# Altium PCB PCB2.PcbDoc
Units mil, origin at the board's own origin, x right, y up, seen from the top; angles counter-clockwise.
Board outline 3660.31 x 1534.33 mil, 2 copper layers (Top Layer, Bottom Layer); 32 components, 30 nets, 109 pads, 1 vias.
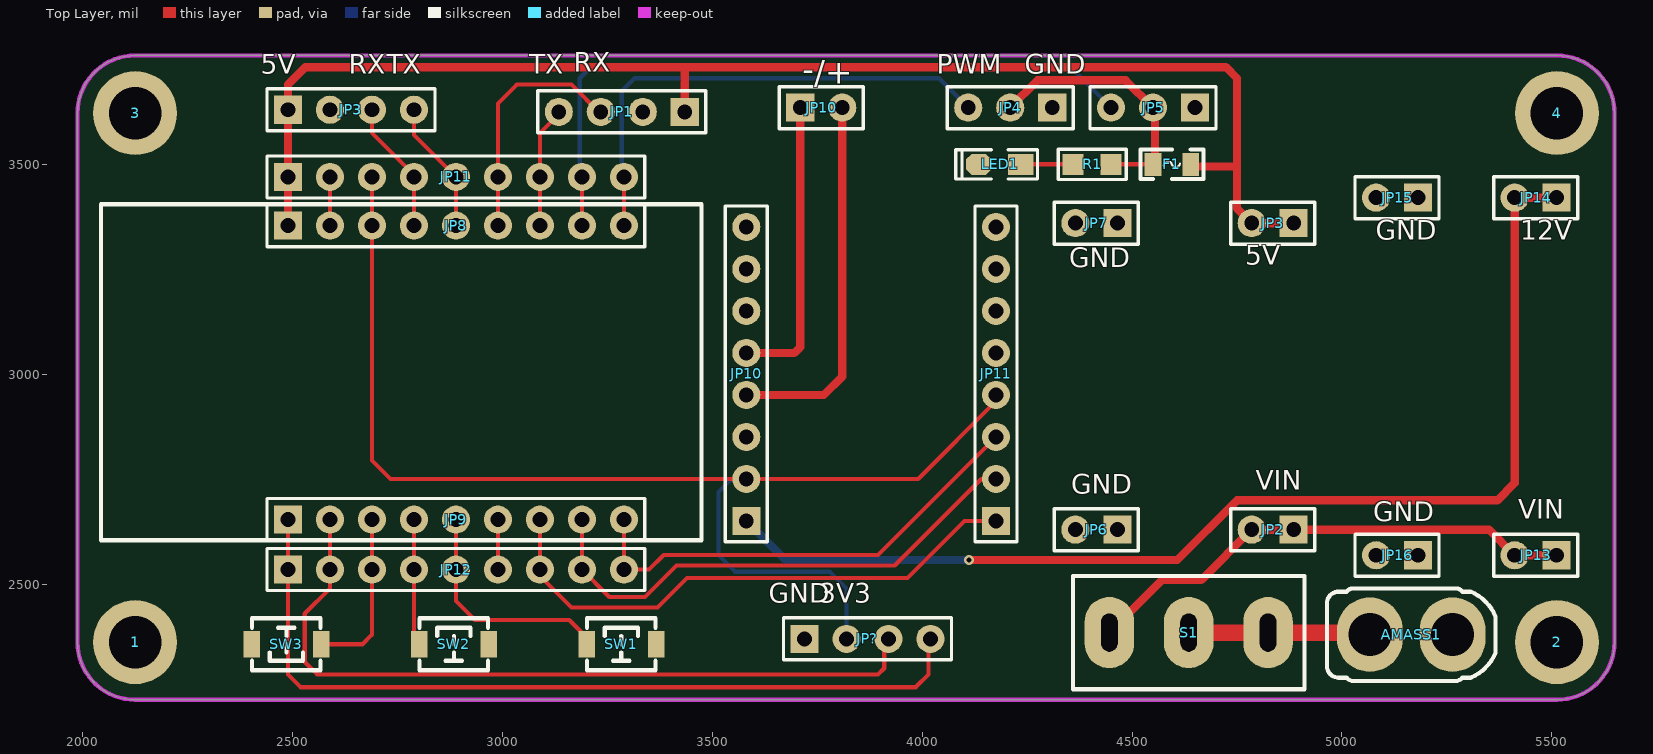
[diagram p0: Top Layer view]
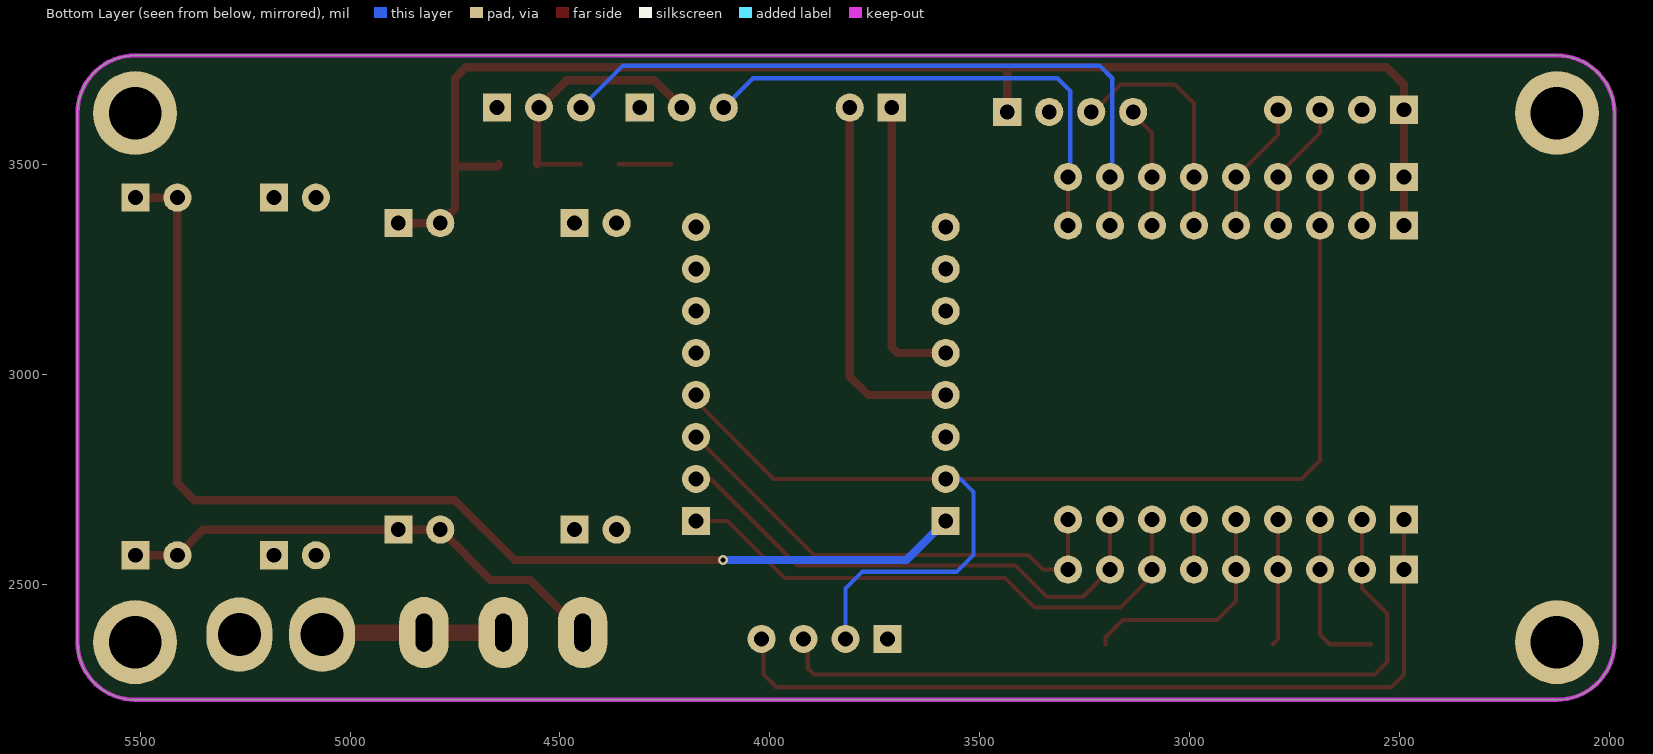
[diagram p1: Bottom Layer view, seen from below]

## Layer stack, top to bottom
Top Solder: solder mask 0.4, Solder Resist, Dk 3.5
Top Layer: signal copper 1.4
Dielectric 1: dielectric 12.6, FR-4, Dk 4.8
Bottom Layer: signal copper 1.4
Bottom Solder: solder mask 0.4, Solder Resist, Dk 3.5

## Board outline
2125.98,2224.96 cw(c2125.98,2362.2) 1988.74,2362.2 1988.74,3622.05 cw(c2125.98,3622.05) 2125.98,3759.29 5511.81,3759.29 cw(c5511.81,3622.05) 5649.06,3622.05 5649.06,2362.2 cw(c5511.81,2362.2) 5511.81,2224.96

## Design rules (kind name [scope] priority, off if disabled: settings)
Clearance [All] p1: gap=7.87 ignorepadtopadclearanceinfootprint=TRUE
PlaneConnect [All] p1: planeconnectstyle=Direct reliefexpansion=20 reliefentries=4 reliefconductorwidth=10 reliefairgap=10
PolygonConnect [All] p1: connectstyle=Direct reliefconductorwidth=10 reliefentries=4 polygonreliefangle="90 Angle" airgapwidth=10
RoutingVias [All] p1: holewidth=28 width=50 viastyle="Through Hole" minholewidth=28 minwidth=50 maxholewidth=28 maxwidth=50
SolderMaskExpansion [All] p1: expansion=4 istentingtop=FALSE
Width [All] p1: maxlimit=393.7 minlimit=10 preferedwidth=10 minimp=50.000000 maximp=50.000000 favimp=50.000000
29 further rules are at their usual default settings.

## Classes and differential pairs
component class Sheet3: 1 2 3 4 AMASS1 F1 JP1 JP2 JP3 JP4 JP5 JP6 JP7 JP8 JP9 JP10 JP11 JP12 JP13 JP14 JP15 JP16 JP? LED1 R1 S1 SW1 SW2 SW3

## Components (designator, comment, footprint, x,y, rotation, side; value= is the part's Value field where it differs from the comment)
1 "M3" "M3 125X200" 2125.98,2362.2 r90 top
2 "M3" "M3 125X200" 5511.81,2362.2 r90 top
3 "M3" "M3 125X200" 2125.98,3622.05 r90 top
4 "M3" "M3 125X200" 5511.81,3622.05 r90 top
AMASS1 "XT30x-F" XT30U-M 5165,2380 r0 top
F1 "6V/0.35A" "FU 0805" 4595,3500 r180 top
JP1 "HDR-1X4" HDR2.54-LI-4P 3285,3625 r180 top
JP2 "HDR-1X2" HDR2.54-LI-2P 4835,2630 r180 top
JP3 "HDR-1X4" HDR2.54-LI-4P 2640,3630 r0 top
JP3 "HDR-1X2" HDR2.54-LI-2P 4835,3360 r180 top
JP4 "HDR-1X3" HDR2.54-LI-3P 4210,3635 r180 top
JP5 "HDR-1X3" HDR2.54-LI-3P 4550,3635 r180 top
JP6 "HDR-1X2" HDR2.54-LI-2P 4415,2630 r180 top
JP7 "HDR-1X2" HDR2.54-LI-2P 4415,3360 r180 top
JP8 "HDR-1X9" HDR2.54-M-LI-9P 2890,3354.09 r0 top locked
JP9 "HDR-1X9" HDR2.54-M-LI-9P 2890,2654.09 r0 top locked
JP10 "HDR-1X2" HDR2.54-LI-2P 3760,3635 r0 top
JP10 "HDR-1X8" HDR2.54-M-LI-8P 3581.5,3000.91 r90 top
JP11 "HDR-1X9" HDR2.54-LI-9P 2890,3470 r0 top
JP11 "HDR-1X8" HDR2.54-M-LI-8P 4175.98,3000.91 r90 top
JP12 "HDR-1X9" HDR2.54-LI-9P 2890,2535 r0 top
JP13 "HDR-1X2" HDR2.54-LI-2P 5461.14,2569.06 r180 top
JP14 "HDR-1X2" HDR2.54-LI-2P 5461.14,3420.63 r180 top
JP15 "HDR-1X2" HDR2.54-LI-2P 5131.22,3420.63 r180 top
JP16 "HDR-1X2" HDR2.54-LI-2P 5131.22,2569.06 r180 top
JP? "HDR-1X4" HDR2.54-M-LI-4P 3870,2370 r0 top
LED1 "Colour" "LED 0805G" 4185,3500 r180 top
R1 "1K" "R 0805_M" 4405,3500 r0 top
S1 "SS-12F23" SS-12D10 4635,2385 r180 top
SW1 "6x6x5" "TSW SMD-3*4*2" 3283.84,2357.2 r0 top
SW2 "6x6x5" "TSW SMD-3*4*2" 2885,2357.2 r0 top
SW3 "6x6x5" "TSW SMD-3*4*2" 2486.16,2357.2 r180 top

## Footprints (in the part's own frame and the unit in brackets; to place one, negate y for a bottom-side part, rotate by r counter-clockwise, add the part's x,y. Pads: shape width x height; smd on the part's side, far side on the other; paste and mask are expansions set on the pad)
"FU 0805" [mil] "贴片保险丝"
  rect 40x55 smd: 1(-45,0) 2(45,0)
  silkscreen extent -75,-35 75,35, body extent -39,-24 39,24, height 20
HDR2.54-LI-2P [mm] "排针，2脚"
  rect 1.7x1.7 hole 0.9: 1(-1.27,0)
  round 1.7 hole 0.9: 2(1.27,0)
  silkscreen extent -2.54,-1.27 2.54,1.27, body extent -2.54,-1.27 2.54,1.27, height 8.5
HDR2.54-LI-3P [mm] "排针，3脚"
  rect 1.7x1.7 hole 0.9: 1(-2.54,0)
  round 1.7 hole 0.9: 2(0,0) 3(2.54,0)
  silkscreen extent -3.81,-1.27 3.81,1.27, body extent -3.81,-1.27 3.81,1.27, height 8.5
HDR2.54-LI-4P [mm] "排针，4脚"
  rect 1.7x1.7 hole 0.9: 1(-3.81,0)
  round 1.7 hole 0.9: 2(-1.27,0) 3(1.27,0) 4(3.81,0)
  silkscreen extent -5.08,-1.27 5.08,1.27, body extent -5.08,-1.27 5.08,1.27, height 8.5
HDR2.54-LI-9P [mm] "排针，9脚"
  rect 1.7x1.7 hole 0.9: 1(-10.16,0)
  round 1.7 hole 0.9: 2(-7.62,0) 3(-5.08,0) 4(-2.54,0) 5(0,0) 6(2.54,0) 7(5.08,0) 8(7.62,0) 9(10.16,0)
  silkscreen extent -11.43,-1.27 11.43,1.27, body extent -11.43,-1.27 11.43,1.27, height 8.5
HDR2.54-M-LI-4P [mm] "排母，4脚"
  rect 1.7x1.7 hole 0.9: 1(-3.81,0)
  round 1.7 hole 0.9: 2(-1.27,0) 3(1.27,0) 4(3.81,0)
  silkscreen extent -5.08,-1.27 5.08,1.27, body extent -5.08,-1.27 5.08,1.27, height 8.5
HDR2.54-M-LI-8P [mm] "排母，8脚"
  rect 1.7x1.7 hole 0.9: 1(-8.89,0)
  round 1.7 hole 0.9: 2(-6.35,0) 3(-3.81,0) 4(-1.27,0) 5(1.27,0) 6(3.81,0) 7(6.35,0) 8(8.89,0)
  silkscreen extent -10.16,-1.27 10.16,1.27, body extent -10.16,-1.27 10.16,1.27, height 8.5
HDR2.54-M-LI-9P [mm] "排母，9脚"
  rect 1.7x1.7 hole 0.9: 1(-10.16,0)
  round 1.7 hole 0.9: 2(-7.62,0) 3(-5.08,0) 4(-2.54,0) 5(0,0) 6(2.54,0) 7(5.08,0) 8(7.62,0) 9(10.16,0)
  silkscreen extent -11.43,-1.27 11.43,1.27, body extent -11.43,-1.27 11.43,1.27, height 8.5
"LED 0805G" [mil] "绿色0805LED"
  rect 60x50 smd: 1(-50,0)
  oct 60x50 smd: 2(50,0)
  silkscreen extent -90,-35 105,35, body extent -39,-25 39,25, height 32
"M3 125X200" [mil] "M3螺丝孔，孔125Mil，焊盘200Mil"
  round 200 hole 125: 1(0,0)
"R 0805_M" [mil] "1/8W贴片电阻"
  rect 50x50 smd: 1(-45,0) 2(45,0)
  silkscreen extent -81,-36 81,36, body extent -39,-25 39,25, height 20
SS-12D10 [mm] "脚距4.8mm"
  oval 3x4.3 hole 2.3 slot 1 at 0 deg: 1(-4.8,0) 2(0,0) 3(4.8,0)
  silkscreen extent -7,-3.43 7,3.43, body extent -6.71,-3.3 6.71,3.3, height 11.8
"TSW SMD-3*4*2" [mm] "3*4*2mm"
  rect 1x1.6 smd: 1(-2.1,0) 2(2.1,0)
  silkscreen extent -2.08,-1.58 2.08,1.58, body extent -2.45,-1.45 2.45,1.45, height 2
XT30U-M [mm] "长：10.2mm，宽：5.2mm，高：10.7mm"
  oval 4x4.5 hole 2.6: 1(-2.5,0) 2(2.5,0)
  silkscreen extent -5.1,-2.8 5.1,2.8, body extent -5.1,-2.8 5.1,2.8, height 10.71

## Part data
1 2 3 4: "铜柱孔"
AMASS1: library part XT30, "Amass防打火电源接口，XT30系列"
F1: library part FU, "贴片保险丝", BOM名称=贴片, 学习资源=www.ooocke.
JP1 JP3 JP?: library part "Header 4", "4P接插件"
  JP1: BOM名称=4P, 学习资源=www.oooc
  JP3 JP?: BOM名称=4P接, 学习资源=www.ooocke.
JP2 JP3 JP6 JP7 JP10 JP13 JP14 JP15 JP16: library part "Header 2", "2P接插件", BOM名称=2P, 学习资源=www.oooc
JP4 JP5: library part "Header 3", "3P接插件", BOM名称=3P, 学习资源=www.oooc
JP8 JP9 JP11 JP12: library part "Header 9", "9P接插件"
  JP8 JP9: BOM名称=9P, 学习资源=www.oooc
  JP11 JP12: BOM名称=9P接, 学习资源=www.ooocke.
JP10 JP11: library part "Header 8", "8P接插件", BOM名称=8P, 学习资源=www.oooc
LED1: library part LED-SMD, "贴片LED", BOM名称=贴片, 学习资源=www.ooocke.
R1: library part R, "贴片电阻", BOM名称=贴?, 学习资源=www.ooocke.
S1: library part SSW-1P, "1路拨动开关", BOM名称=?, 学习资源=www.oooc
SW1 SW2 SW3: library part "TSW SMD-6x6", "贴片6x6轻触开关", BOM名称=贴片6, 学习资源=www.oooc

## Via types
v1: diameter 24, hole 12, Top Layer to Bottom Layer, 1 vias

## Nets (pads, with @x,y where several pads share a name; then routed paths per layer and width w, separated by ;. In a path a pad name is that pad's centre, name@x,y a point inside that pad or via, vN(x,y) a via of type N, cw(c..) or ccw(c..) an arc to the next point about the centre after c; other vN are vias at no path point)
2S_VIN: JP2.1 JP2.2 JP13.1 JP13.2 S1.3 | length 1191.8
  Top Layer w19.68: S1.3 4571.02,2510 4665,2510 JP2.2 JP2.1 5350.2,2630 JP13.2 JP13.1
3V3: JP8.3 JP10.2@3581.5,2750.91 JP11.3@2690,3470 JP11.4@4175.98,2950.91 JP?.2 | length 2958.3
  Top Layer w10: JP11.3@2690,3470 JP8.3 2690,2795 2734.09,2750.91 3581.5,2750.91 3990.91,2750.91 4175.98,2935.98 JP11.4@4175.98,2950.91
  Bottom Layer w10: JP10.2@3581.5,2750.91 3545.91,2750.91 3515,2720 3515,2570 3555,2530 3780,2530 3820,2490 JP?.2
5V: F1.1 JP1.1 JP3.1 JP3.2@4785,3360 JP8.1 JP11.1@2490,3470 | length 3287.1
  Top Layer w19.68: JP8.1 2490,3470 2490,3690 2531.5,3731.5 3435,3731.5 ; JP1.1@3435,3635 3435,3731.5 ; F1.1@4645,3500 4650,3495 4750,3495 ; JP3.1@4885,3360 4785,3360 4750,3395 4750,3495 ; 3435,3731.5 4723.5,3731.5 4750,3705 4750,3495
5V_POWER: F1.2 JP4.2 JP5.2 R1.2 | length 630.9
  Top Layer w10: R1.2 F1.2
  Top Layer w19.68: JP4.2 4275,3700 4485,3700 JP5.2 4555,3630 F1.2@4555,3500
12V: JP10.1@3581.5,2650.91 JP14.1 JP14.2 | length 2723.7
  Top Layer w19.68: v1(4112.29,2557.71) 4607.71,2557.71 4750,2700 5370,2700 5411.14,2741.14 JP14.2 JP14.1
  Bottom Layer w19.68: JP10.1@3581.5,2650.91 3674.69,2557.71 v1(4112.29,2557.71)
AIN1: JP9.9 JP11.3@4175.98,2850.91 JP12.9 | length 1135.9
  Top Layer w10: JP9.9 JP12.9 3350,2535 3385,2570 3895.08,2570 JP11.3@4175.98,2850.91
AO1: JP10.2@3810,3635 JP10.4 | length 886.8
  Top Layer w19.68: JP10.4 3765.91,2950.91 3810,2995 JP10.2@3810,3635
AO2: JP10.1@3710,3635 JP10.5 | length 704.3
  Top Layer w19.68: JP10.5 3695.91,3050.91 3710,3065 JP10.1@3710,3635
BIN1: JP11.5@4175.98,3050.91
BO1: JP10.7
BO2: JP10.6
DIR_A: JP9.8 JP11.2@4175.98,2750.91 JP12.8 | length 1248.4
  Top Layer w10: JP9.8 JP12.8 3255,2470 3340,2470 3415,2545 3935,2545 4140.91,2750.91 JP11.2@4175.98,2750.91
DIR_B: JP11.6@4175.98,3150.91
GND: AMASS1.2 JP1.2 JP3.2@2590,3630 JP4.1 JP5.1 JP6.1 JP6.2 JP7.1 JP7.2 JP8.2 JP10.3 JP10.8 JP11.2@2590,3470 JP11.8@4175.98,3350.91 JP15.1 JP15.2 JP16.1 JP16.2 JP?.1 LED1.2 SW1.2 SW2.2 SW3.2 | length 115.9
  Top Layer w10: JP8.2 JP11.2@2590,3470
GP0: JP3.3 JP8.4 JP11.4@2790,3470 | length 322.3
  Top Layer w10: JP3.3@2690,3635 2690,3575 2790,3475 2790,3470 JP8.4
GP1: JP3.4 JP8.5 JP11.5@2890,3470 | length 322.3
  Top Layer w10: JP3.4@2790,3635 2790,3570 2890,3470 JP8.5
GP2: JP1.3 JP8.6 JP11.6@2990,3470 | length 583.5
  Top Layer w10: JP8.6 2990,3470 2990,3645 3035,3690 3165,3690 JP1.3@3235,3620
GP3: JP1.4 JP8.7 JP11.7@3090,3470 | length 284.5
  Top Layer w10: JP8.7 3090,3470 3090,3575 JP1.4@3135,3620
GP4: JP5.3 JP8.8 JP11.8@3190,3470 | length 1669.8
  Top Layer w10: JP8.8 JP11.8@3190,3470
  Bottom Layer w10: JP11.8@3185,3470 3185,3705 3215,3735 4350,3735 JP5.3
GP5: JP4.3 JP8.9 JP11.9 | length 1187.3
  Top Layer w10: JP8.9 JP11.9
  Bottom Layer w10: JP11.9@3285,3470 3285,3675 3315,3705 4040,3705 JP4.3
GP12: JP9.4 JP12.4 SW2.1 | length 302
  Top Layer w10: JP9.4 JP12.4 2790,2369.53 SW2.1
GP13: JP9.3 JP12.3 SW3.1 | length 404.7
  Top Layer w10: SW3.1 2667.2,2357.2 2690,2380 JP12.3 JP9.3
GP14: JP9.2 JP12.2 JP?.3 | length 1836.7
  Top Layer w10: JP9.2 JP12.2 2590,2490 2530,2430 2530,2315 2560,2285 3895,2285 3910,2300 3910,2360 JP?.3
GP15: JP9.1 JP12.1 JP?.4 | length 2006
  Top Layer w10: JP9.1 JP12.1 2490,2285 2520,2255 3985,2255 4015,2285 4015,2365 JP?.4
GP19: JP9.7 JP11.1@4175.98,2650.91 JP12.7 | length 1336.4
  Top Layer w10: JP9.7 JP12.7 3090,2520 3165,2445 3370,2445 3440,2515 3965,2515 4100.91,2650.91 JP11.1@4175.98,2650.91
GP20: JP9.6 JP12.6 | length 119.1
  Top Layer w10: JP12.6 JP9.6
GP23: JP9.5 JP12.5 SW1.1 | length 557.6
  Top Layer w10: JP9.5 JP12.5 2890,2460 2935,2415 3160,2415 3201.16,2373.84 SW1.1
NetLED1_1: LED1.1 R1.1 | length 125
  Top Layer w10: LED1.1 R1.1
PWMB: JP11.7@4175.98,3250.91
VIN: AMASS1.1 S1.1 S1.2 | length 433.6
  Top Layer w39.37: S1.2 S1.1 5061.57,2385 AMASS1.1
pads on no net: 1.1 2.1 3.1 4.1

## Polygon pours and split planes (outlines as drawn)
GND on Top Layer "Top Layer-No Net" (solid, shelved, pour order 2): 2125.98,2224.96 cw(c2125.98,2362.2) 1988.74,2362.2 1988.74,3622.05 cw(c2125.98,3622.05) 2125.98,3759.29 5511.81,3759.29 cw(c5511.81,3622.05) 5649.06,3622.05 5649.06,2362.2 cw(c5511.81,2362.2) 5511.81,2224.96
GND on Bottom Layer "Top Layer-No Net1" (solid, shelved, pour order 3): 2125.98,2224.96 cw(c2125.98,2362.2) 1988.74,2362.2 1988.74,3622.05 cw(c2125.98,3622.05) 2125.98,3759.29 5511.81,3759.29 cw(c5511.81,3622.05) 5649.06,3622.05 5649.06,2362.2 cw(c5511.81,2362.2) 5511.81,2224.96

## Keep-outs
Keep-Out Layer:
  the board outline again, w10

## Silkscreen, mask and mechanical layers (free items; w line width, h text height)
Top Overlay:
  lines w10: 2044.72,2605 3475,2605 3475,3405 2044.72,3405 2044.72,2605
  text "+/-" at 3835,3759.29 h98.43 r180
  text "RX" at 3170,3705 h78.74
  text "5V" at 2425,3700 h78.74
  text "RX" at 2635,3700 h78.74
  text "TX" at 2725,3700 h78.74
  text "TX" at 3065,3700 h78.74
  text "PWM" at 4035,3700 h78.74
  text "GND" at 4245,3700 h78.74
  text "GND" at 5080,3305 h78.74
  text "12V" at 5425,3305 h78.74
  text "5V" at 4770,3245 h78.74
  text "GND" at 4350,3240 h78.74
  text "VIN" at 4795,2710 h78.74
  text "GND" at 4355,2700 h78.74
  text "VIN" at 5420,2640 h78.74
  text "GND" at 5075,2635 h78.74
  text "GND" at 3635,2440 h78.74
  text "3V3" at 3755,2440 h78.74